# Altium PCB Elreg_Sender_NoFPGA.PcbDoc (part 1 of 2)
Units mil, origin at the board's own origin, x right, y up, seen from the top; angles counter-clockwise.
Board outline 6000 x 4000 mil, 4 copper layers (Top Layer, L2_GND, L3_GND, Bottom Layer), stack 62.362 mil thick; 139 components, 68 nets, 309 pads, 0 vias.
Unrouted connection lines stored in the file: 233.
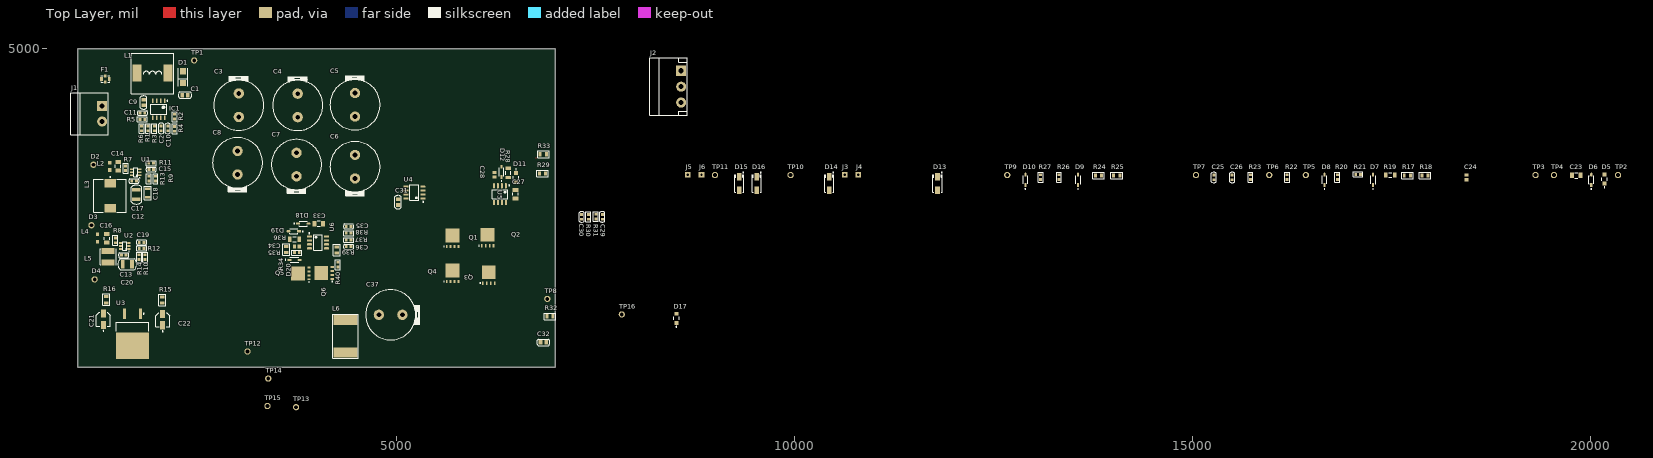
[diagram p0: Top Layer view]
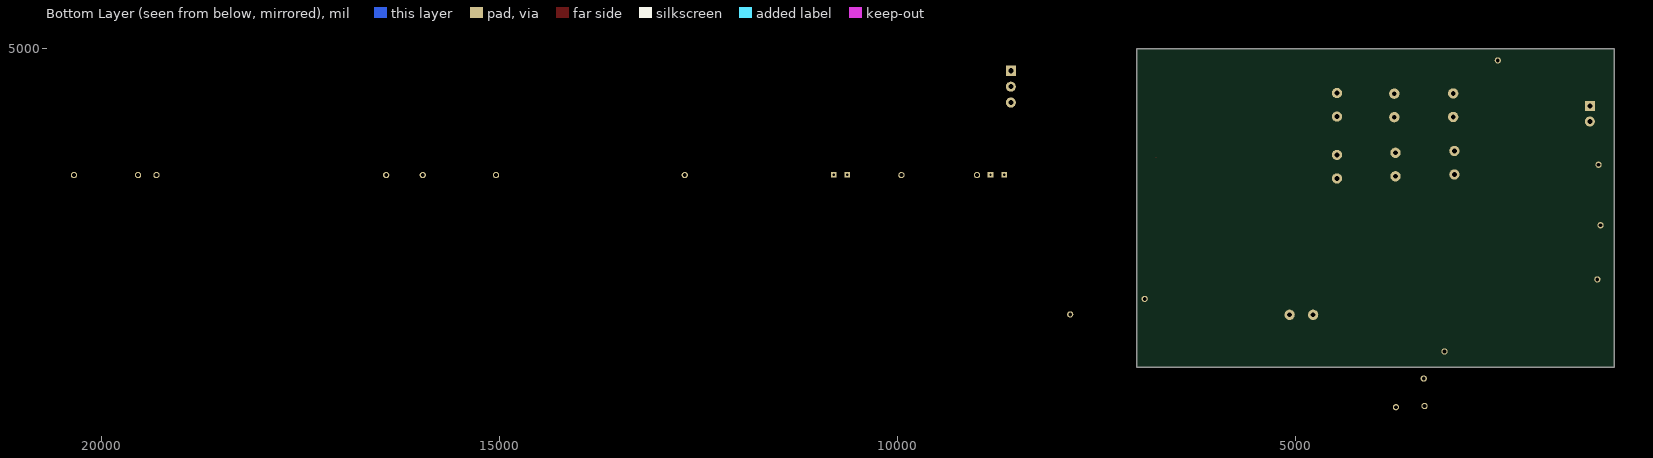
[diagram p1: Bottom Layer view, seen from below]
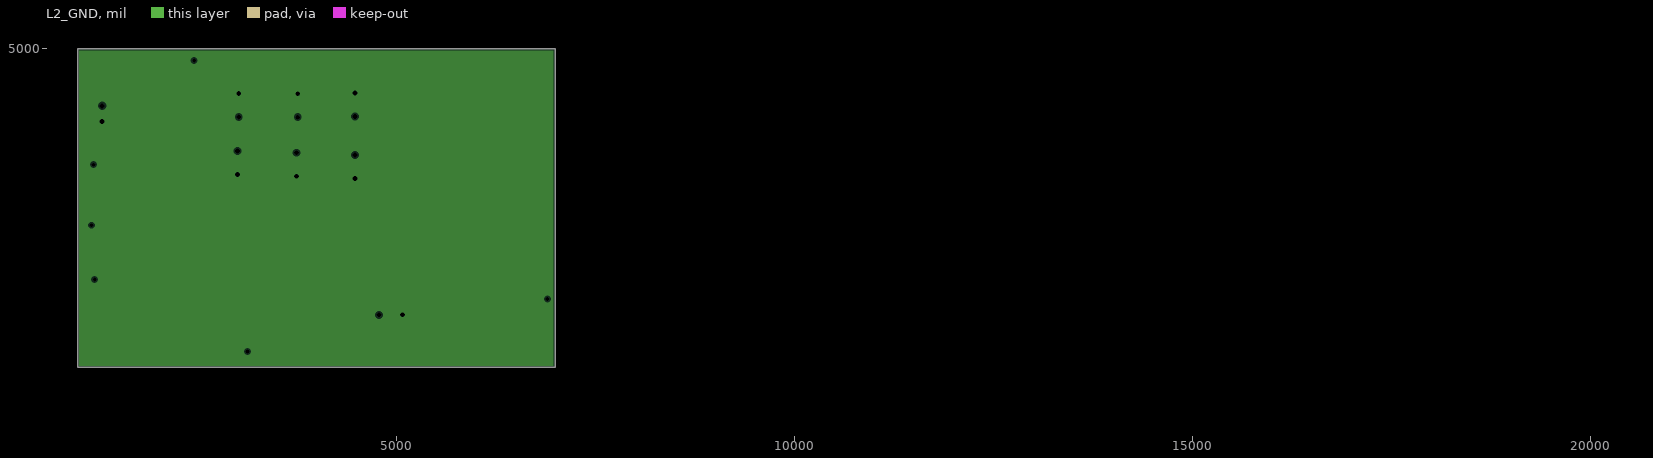
[diagram p2: L2_GND, clearances drawn from the general rule]
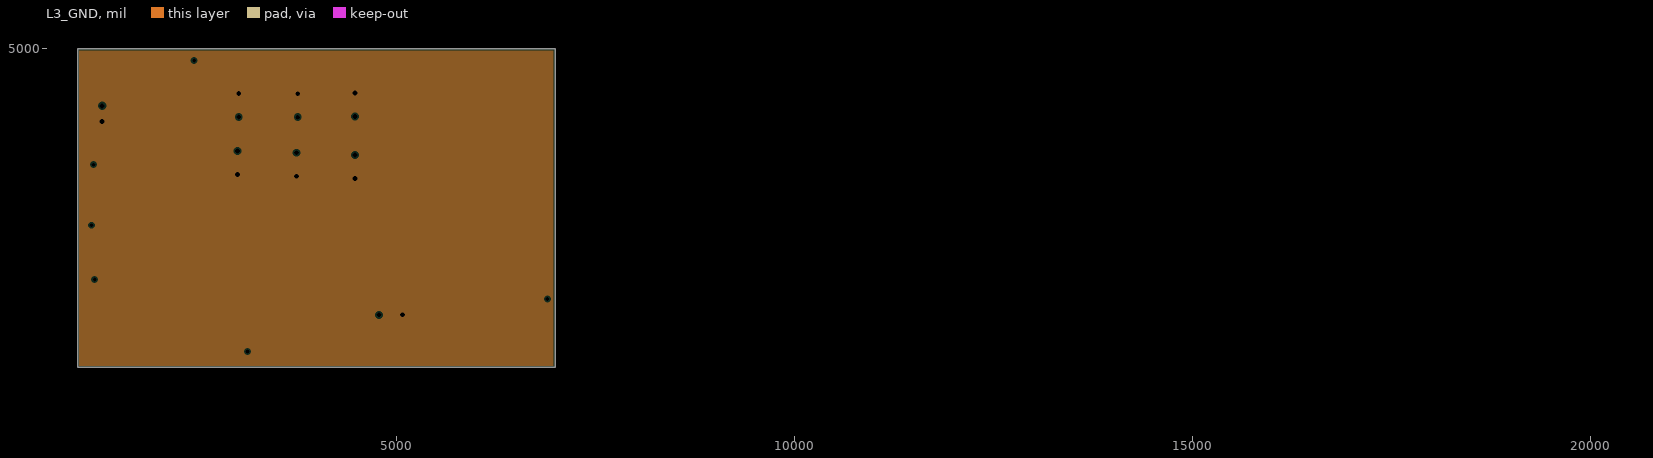
[diagram p3: L3_GND, clearances drawn from the general rule]

## Layer stack, top to bottom
Top Solder: solder mask 0.3937, Solder Resist, Dk 3.5
Top Layer: signal copper 1.378
Dielectric 2: prepreg 7.0866, PP-006, Dk 4.1
L2_GND: plane copper 0.6693, net GND
Dielectric 1: core 44.0945, FR-4, Dk 4.8
L3_GND: plane copper 0.6693, net GND
Dielectric 3: prepreg 7.0866, PP-006, Dk 4.1
Bottom Layer: signal copper 1.378
Bottom Solder: solder mask 0.3937, Solder Resist, Dk 3.5

## Board outline
1000,1000 7000,1000 7000,5000 1000,5000

## Design rules (kind name [scope] priority, off if disabled: settings)
Clearance [All] p1: gap=10 ignorepadtopadclearanceinfootprint=FALSE except(0: Arc-Hole Track-Hole SMDPad-Hole THPad-Hole Via-Hole Fill-Hole Poly-Hole Region-Hole Text-Hole)
PlaneClearance [All] p1: clearance=20
PlaneConnect [All] p1: planeconnectstyle=Relief reliefexpansion=20 reliefentries=4 reliefconductorwidth=10 reliefairgap=10
PolygonConnect [All] p1: connectstyle=Relief reliefconductorwidth=10 reliefentries=4 polygonreliefangle="90 Angle" airgapwidth=10
RoutingVias [All] p1: holewidth=28 width=50 viastyle="Through Hole" minholewidth=28 minwidth=50 maxholewidth=28 maxwidth=50
SolderMaskExpansion [All] p1: expansion=4 istentingtop=FALSE
Width [All] p1: maxlimit=10 minlimit=10 preferedwidth=10
28 further rules are at their usual default settings.

## Classes and differential pairs
component class Designator: C33 C34 C35 C36 C37 D16 D18 D19 D20 L6 Q5 Q6 R34 R35 R36 R37 R38 R39 R40 TP12 TP13 TP14 TP15 TP16 U6
component class "TRANSMIT CH 1": C23 C24 C25 C26 C27 C28 C29 C32 D5 D6 D7 D9 D10 D12 D14 D16 J3 J5 Q1 Q2 Q3 R17 R18 R19 R20 R21 R22 R23 R24 R25 R26 R27 R28 R29 R30 R31 R32 R33 TP3 TP6 TP7 TP10 U4 U5
component class Sender_Top: J1 J2
component class "POWER CIRCUIT": C1 C2 C3 C4 C5 C6 C7 C8 C9 C10 C11 C12 C13 C14 C15 C16 C17 C18 C19 C20 C21 C22 D1 D2 D4 F1 IC1 L1 L2 L3 L4 L5 R1 R2 R3 R4 R5 R6 R7 R8 R9 R10 R11 R12 R13 R14 R15 R16 TP3 U1 U2 U3

## Components (designator, comment, footprint, x,y, rotation, side; value= is the part's Value field where it differs from the comment)
C1 "100uF 50V" C-0805 2349.57,4420 r0 top
C2 "10uF 50V" C-0603 2050,4000 r270 top
C3 "35V2200u" CAP_16X25 3025,4292.36 r90 top
C4 "35V2200u" CAP_16X25 3765,4290 r90 top
C5 "35V2200u" CAP_16X25 4485,4297.36 r90 top
C6 "35V2200u" CAP_16X25 4485,3520 r270 top
C7 "35V2200u" CAP_16X25 3750,3547.36 r270 top
C8 "35V2200u" CAP_16X25 3010,3570 r270 top
C9 "10uF 50V" C-0805 1830,4325 r270 top
C10 "100nF 20V" C-0603 2135,4000 r90 top
C11 "10uF 50V" C-0603 1814.53,4195 r180 top
C12 "0.1uF/25V" C-0603 1710,3340 r0 top
C13 "0.1uF/25V" C-0603 1580,2410 r0 top
C14 "2.2uF/50V" FP-CL31-IPC_B 1510,3525 r270 top
C15 "22pF/25V" C-0603 1925.47,3485 r0 top
C16 "2.2uF/50V" FP-CL31-IPC_B 1370,2620 r270 top
C17 "22uF/25V" CAP-1210 1740,3170 r270 top
C18 "10uF/25V" "C-1206 (3216 metric)" 1880,3190 r90 top
C19 "22pF/25V" C-0603 1805,2570 r0 top
C20 "22uF/25V" CAP-1210 1625,2295 r180 top
C21 "0.1uF/35V" FP-UUP1H0R1MCL1GS-MFG 1325,1605 r90 top
C22 "0.33uF/35V" FP-UUP1H0R1MCL1GS-MFG 2070,1600 r90 top
C23 "2.2uF/50V" FP-CL31-IPC_B 19820,3410 r0 top
C24 "1uF/25V" CAPC2013X70X45LL10T25 18440,3385 r90 top
C25 "100pF/25V" C-0603 15270,3385 r90 top
C26 "100pF/25V" C-0603 15500,3385 r90 top
C27 "2.2uF/50V" FP-CL31-IPC_B 6500,3175.38 r90 top
C28 "1uF/25V" CAPC2013X70X45LL10T25 6235,3419.09 r270 top
C29 "100pF/25V" C-0603 7590,2890 r270 top
C30 "100pF/25V" C-0603 7330,2889.53 r90 top
C31 "C-0805" C-0805 5025,3075 r270 top
C32 "C-0805" C-0805 6849.57,1315 r0 top
C33 "2.2uF/50V" FP-CL31-IPC_B 4030,2805 r180 top
C34 "1uF/25V" CAPC2013X70X45LL10T25 3754.53,2520 r0 top
C35 "100pF/25V" C-0603 4405,2770 r180 top
C36 "100pF/25V" C-0603 4405,2515 r180 top
C37 "100uF/100V" CAP_16X25 4932.36,1660 r0 top
D1 "DIODE SCHOTTKY 40V 1A DO214AC" DFN380P520X45-2N 2325,4720 r90 top
D2 "Test_Point" Test_Point 1200,3545 r0 top
D3 "Test_Point" Test_Point 1175,2785 r0 top
D4 "Test_Point" Test_Point 1215,2105 r0 top
D5 "MBR2H200SFT1G" FP-498-MFG 20175,3365 r90 top
D6 "B0530W-7-F" FP-SOD123-IPC_B 20010,3355 r90 top value=170pF
D7 "B0530W-7-F" FP-SOD123-IPC_B 17270,3355 r90 top value=170pF
D8 "B0530W-7-F" FP-SOD123-IPC_B 16660,3355 r90 top value=170pF
D9 "B0530W-7-F" FP-SOD123-IPC_B 13565,3355 r90 top value=170pF
D10 "B0530W-7-F" FP-SOD123-IPC_B 12905,3355 r90 top value=170pF
D11 "MBR2H200SFT1G" FP-498-MFG 6505,3382.64 r270 top
D12 "B0530W-7-F" FP-SOD123-IPC_B 6325,3454.54 r90 top value=170pF
D13 "ES1D" SMA 11800,3310 r90 top
D14 "ES1D" SMA 10440,3310 r90 top
D15 "ES1D" SMA 9310,3310 r90 top
D16 "ES1D" SMA 9530,3310 r90 top
D17 "MBR2H200SFT1G" FP-498-MFG 8520,1615 r90 top
D18 "B0530W-7-F" FP-SOD123-IPC_B 3835,2805 r0 top value=170pF
D19 "B0530W-7-F" FP-SOD123-IPC_B 3715,2710 r180 top value=170pF
D20 "B0530W-7-F" FP-SOD123-IPC_B 3725,2350 r0 top value=170pF
F1 "SBSPP0500683MX" Filter_SBSPP0500 1301,4622 r0 top
IC1 "LM5002" SOIC127P600X205-8N 2095,4349.57 r270 top
J1 "24V IN" WAGO_2_pins 1310,4285 r270 top
J2 "CONN 3x1" WAGO-3_pins 8580,4525 r270 top
J3 "CON1_b" "CONN1 _b" 10635,3420 r0 top
J4 "CON1_b" "CONN1 _b" 10805,3420 r0 top
J5 "CON1_b" "CONN1 _b" 8665,3420 r0 top
J6 "CON1_b" "CONN1 _b" 8835,3420 r0 top
L1 "330UH 1.15A" IND 1749.17,4695 r0 top
L2 "742792037" SMD-0805 1405,3525 r270 top
L3 "33uH/1.6A" FP-DS104C2-MFG 1410,3155 r270 top
L4 "742792037" SMD-0805 1250,2625 r270 top
L5 "15uH/1.2A" FP-LQH5BPB_T0-MFG 1385,2390 r270 top
L6 "260nH/72A" PA2891_FOOTPRINT 4365,1390 r90 top
Q1 "BUK7Y9R9-80EX" NXP-SOT669_N 5710,2619.57 r90 top
Q2 "BUK7Y9R9-80EX" NXP-SOT669_N 6150,2630 r90 top
Q3 "BUK7Y9R9-80EX" NXP-SOT669_N 6165,2160 r90 top
Q4 "BUK7Y9R9-80EX" NXP-SOT669_N 5710,2179.57 r90 top
Q5 "BUK7Y9R9-80EX" NXP-SOT669_N 3805,2180 r180 top
Q6 "BUK7Y9R9-80EX" NXP-SOT669_N 4095.43,2185 r180 top
R1 "54.9k  0805" R-0603 1885,4000 r270 top
R2 "60k4" R-0603 2220,4149.53 r90 top
R3 "73.2k  0805" R-0603 1965,4000 r90 top
R4 "6k04" R-0603 2220,3995 r90 top
R5 "52.3k  0805" R-0603 1815,4115 r0 top
R6 "1.47k  0805" R-0603 1805,4000 r90 top
R7 "100k" R-0603 1605,3500 r90 top
R8 "100k" R-0603 1475,2595 r90 top
R9 "51R" R-0603 1980,3370.47 r270 top
R10 "51R" R-0603 1850,2385 r270 top
R11 "243k" R-0603 1925,3565 r0 top
R12 "105k" R-0603 1805,2495 r0 top
R13 "22.1k" R-0603 1895,3370.47 r90 top
R14 "21k" R-0603 1775,2385 r90 top
R15 "0R" RES-0805 2065,1845 r270 top
R16 "0R" RES-0805 1360,1850 r270 top
R17 "8.2R" RES-0805 17700,3410 r0 top
R18 "8.2R" RES-0805 17920,3410 r0 top
R19 "2R" RESC3216X60X45NL10T20 17485,3415 r0 top
R20 "10k" R-0603 16820,3390 r90 top
R21 "10k" R-0603 17080,3425 r0 top
R22 "1k" R-0603 16190,3390 r90 top
R23 "1k" R-0603 15730,3390 r90 top
R24 "8.2R" RES-0805 13820,3410 r0 top
R25 "8.2R" RES-0805 14050,3410 r0 top
R26 "10k" R-0603 13325,3390 r90 top
R27 "10k" R-0603 13095,3390 r90 top
R28 "2R" RESC3216X60X45NL10T20 6410,3441.65 r90 top
R29 "0R" RES-0805 6840,3435 r0 top
R30 "1k" R-0603 7415,2890 r90 top
R31 "1k" R-0603 7510,2894.53 r270 top
R32 "0R NM" RES-0805 6934.37,1640 r0 top
R33 "0R" RES-0805 6850,3675 r0 top
R34 "8.2R" RES-0805 3620,2480 r270 top
R35 "10k" R-0603 3754.53,2440 r180 top
R36 "2R" RESC3216X60X45NL10T20 3725,2610 r180 top
R37 "1k" R-0603 4405,2600 r180 top
R38 "1k" R-0603 4405,2685 r180 top
R39 "8.2R" RES-0805 4255,2475 r270 top
R40 "10k" R-0603 4270,2290.47 r90 top
TP1 "Test_Point" Test_Point 2465,4855 r0 top
TP2 "Test_Point" Test_Point 20345,3415 r0 top
TP3 "Test_Point" Test_Point 19310,3415 r0 top
TP4 "Test_Point" Test_Point 19540,3415 r0 top
TP5 "Test_Point" Test_Point 16425,3415 r0 top
TP6 "Test_Point" Test_Point 15965,3415 r0 top
TP7 "Test_Point" Test_Point 15045,3415 r0 top
TP8 "Test_Point" Test_Point 6900,1860 r0 top
TP9 "Test_Point" Test_Point 12675,3415 r0 top
TP10 "Test_Point" Test_Point 9955,3415 r0 top
TP11 "Test_Point" Test_Point 9005,3415 r90 top
TP12 "Test_Point" Test_Point 3135,1200 r90 top
TP13 "Test_Point" Test_Point 3745,500 r90 top
TP14 "Test_Point" Test_Point 3395,860 r90 top
TP15 "Test_Point" Test_Point 3385,515 r90 top
TP16 "Test_Point" Test_Point 7835,1665 r90 top
U1 "LMR50410XFDBVR" SOT-23 1730,3450 r180 top
U2 "LMR50410XFDBVR" SOT-23 1595,2525 r180 top
U3 "MC7806BD2TG" D2PAK 1690,1425 r270 top
U4 "UCC27211D" "D-8 PIN 1.27pitch" 5230,3194.57 r180 top
U5 "UCC27211D" "D-8 PIN 1.27pitch" 6305,3174.57 r270 top
U6 "UCC27211D" "D-8 PIN 1.27pitch" 4020,2570 r0 top

## Footprints (in the part's own frame and the unit in brackets; to place one, negate y for a bottom-side part, rotate by r counter-clockwise, add the part's x,y. Pads: shape width x height; smd on the part's side, far side on the other; paste and mask are expansions set on the pad)
C-0603 [mm] "Capacitors 0603"
  rect 0.9x0.95 smd: 1(-0.75,0) 2(0.75,0)
  silkscreen extent -1.68,-0.78 1.66,0.77, body extent -0.8,-0.4 0.8,0.4, height 0.86
C-0805 [mm] "0805"
  rect 1.15x1.45 smd: 1(-0.9,0) 2(0.9,0)
  silkscreen extent -2.12,-1.02 2.12,1.02, body extent -1,-0.63 1,0.63, height 0.78
"C-1206 (3216 metric)" [mm]
  rect 0.9x1.8 smd: 1(-1.35,0) 2(1.35,0)
  silkscreen extent -2.16,-1.14 2.16,1.14, body extent -1.6,-0.85 1.6,0.85, height 1.77
CAP-1210 [mm] "Capacitors, SMD, 1210"
  rect 1.15x2.7 smd: 1(-1.5,0) 2(1.5,0)
  silkscreen extent -3.01,-1.73 3.01,1.73, body extent -1.6,-1.25 1.6,1.25, height 1.3
CAP_16X25 [mil] "Polar Capacitors"
  round 130 hole 59.06: 1(-147.64,0) 2(147.64,0)
  silkscreen extent -315,-315 362,315, body extent -315,-315 313,315, height 985
CAPC2013X70X45LL10T25 [mm] "Chip Capacitor, 2-Leads, Body 2.00x1.25mm, IPC High Density"
  rect 1x1.3 smd: 1(-0.75,0) 2(0.75,0)
  body extent -1.05,-0.67 1.05,0.68, height 0.7
"CONN1 _b" [mm]
  rect 1.8x1.8 hole 0.75: 1(0,0)
D2PAK [mm] "DPAK, 3-Leads, Body 10.24x9.35mm, Pitch 2.54mm"
  rect 3.504x1.016 smd: 1(-6.313,2.54) 3(-6.313,-2.54)
  rect 8.38x10.49 smd: 4(3.9,0)
  silkscreen extent -6.44,-5.12 -0.69,5.12, body extent -6.11,-5.13 8.09,5.13, height 4.75
"D-8 PIN 1.27pitch" [mm] "Pitch 1.27mm"
  rrect50% 1.6x0.7 smd: 1(-2.7,1.905) 2(-2.7,0.635) 3(-2.7,-0.635) 4(-2.7,-1.905) 5(2.7,-1.905) 6(2.7,-0.635) 7(2.7,0.635) 8(2.7,1.905)
  silkscreen extent -2.95,-2.5 1.4,3.08, body extent -2,-2.5 2,2.5, height 1.1
DFN380P520X45-2N [mm] "DFN, 2-Leads, Body 2.50x5.20mm, Pitch 3.80mm, IPC Medium Density"
  rect 2x1.9 smd: 1(0,0) 2(-3.8,0)
  silkscreen extent -4.75,-1.45 0.95,1.45, body extent -4.75,-1.45 0.95,1.45, height 0.45
Filter_SBSPP0500 [mm]
  rect 0.9x1.2 smd: 1(0,0) 3(2.5,0)
  rect 0.8x1 smd: 2(1.245,-0.991) 2(1.245,0.965)
  silkscreen extent -0.13,-1.02 2.67,1.02
FP-498-MFG [mm]
  rect 1.25x1.22 smd paste+0 mask+0: 1(-1.475,0) 2(1.475,0)
  silkscreen extent -2.77,-0.9 0.48,0.9, body extent -2.2,-1 2.2,1, height 0.25
FP-CL31-IPC_B [mil]
  rect 51.4x69.22 smd paste+0 mask+0: 1(-54.19,0) 2(54.19,0)
  silkscreen extent -17,-35 17,35, body extent -90,-44 90,44, height 10
FP-DS104C2-MFG [mm]
  rect 2.65x3.6 smd paste+0 mask+0: 1(-4.025,0) 2(4.025,0)
  silkscreen extent -6.1,-5.2 5.2,5.2, body extent -5.45,-5.3 5.45,5.3, height 0.25
FP-LQH5BPB_T0-MFG [mm]
  rect 1.85x4.1 smd paste+0 mask+0: 1(-1.825,0) 2(1.825,0)
  silkscreen extent -2.6,-2.6 2.6,2.6, body extent -2.85,-2.7 2.85,2.7, height 0.25
FP-SOD123-IPC_B [mil]
  rect 49.51x27.66 smd paste+0 mask+0: 1(-64.98,0)
  rrect100% 49.51x27.66 smd paste+0 mask+0: 2(64.98,0)
  silkscreen extent -119,-31 52,31, body extent -100,-40 100,40, height 10
FP-UUP1H0R1MCL1GS-MFG [mm]
  rect 2.6x1.6 smd paste+0 mask+0: 1(-1.8,0) 2(1.8,0)
  silkscreen extent -3.85,-2.25 2.25,2.25, body extent -3.35,-2.5 3.35,2.5, height 0.25
IND [mm]
  rect 2.9x5.4 smd: 1(0,0) 2(9.8,0)
  silkscreen extent -1.9,-6.6 11.7,6.4
NXP-SOT669_N [mm] "DPAK, 4-Leads, Body 5x4.1mm, Pitch 1.27mm, IPC Medium Density"
  rect 1.05x0.55 smd: 1(-2.6,1.905) 2(-2.6,0.635) 3(-2.6,-0.635) 4(-2.6,-1.905)
  rect 4.4x4.4 smd: 5(0.9,0)
  silkscreen extent -2.72,2.6 -2.48,2.85, body extent -1.9,-2.5 2.2,2.5, height 1.2
PA2891_FOOTPRINT [mm]
  rect 3.18x7.65 smd paste+0: 1(-5.15,0) 2(5.15,0)
  silkscreen extent -6.98,-4.06 6.98,4.06, body extent -6.35,-3.56 6.35,3.68, height 8
R-0603 [mm] "Resistor  0603"
  rect 0.9x0.95 smd: 1(-0.75,0) 2(0.75,0)
  silkscreen extent -1.58,-0.77 1.57,0.77, body extent -0.8,-0.4 0.8,0.4, height 0.86
RES-0805 [mm] "SMD, 0805"
  rect 0.95x1.4 smd: 1(-1,0) 2(1,0)
  silkscreen extent -1.85,-1.08 1.85,1.08, body extent -1,-0.62 1,0.63, height 0.45
RESC3216X60X45NL10T20 [mm] "Chip Resistor, 2-Leads, Body 3.20x1.60mm, IPC Medium Density"
  rect 1.1x1.7 smd: 1(-1.45,0) 2(1.45,0)
  silkscreen extent -0.5,-0.75 0.5,0.75, body extent -1.65,-0.85 1.65,0.85, height 0.6
SMA [mm] "DO-214AC"
  rect 2.35x1.55 smd: 1(-2.15,0) 2(2.15,0)
  silkscreen extent -2.8,-1.5 3.58,1.5, body extent -2.6,-1.3 2.6,1.3, height 2.64
SMD-0805 [mm] "Chip Inductor, 2-Leads, Body 2.0x1.2mm"
  rect 1.15x1 smd: 1(-1.175,0) 2(1.175,0)
  body extent -1,-0.6 1,0.6, height 0.89
SOIC127P600X205-8N [mm] "SOIC, 8-Leads, Body 4.90x3.90mm, Pitch 1.27mm, IPC Medium Density"
  oval 1.45x0.6 smd: 1(0,0) 2(0,-1.27) 3(0,-2.54) 4(0,-3.81) 5(5.45,-3.81) 6(5.45,-2.54) 7(5.45,-1.27) 8(5.45,0)
  silkscreen extent -0.12,-4.41 4.33,0.98, body extent 0.72,-4.41 4.72,0.6, height 2.05
SOT-23 [mm] "Pitch 0.95mm"
  rrect50% 1.1x0.6 smd: 1(-1.3,0.95) 2(-1.3,0) 3(-1.3,-0.95) 4(1.3,-0.95) 5(1.3,0) 6(1.3,0.95)
  silkscreen extent -1.32,-1.4 0.64,1.83, body extent -0.76,-1.4 0.76,1.4, height 1.1
Test_Point [mm]
  round 2 hole 1.2: 1(0,0)
WAGO-3_pins [mm] "3 pin connector"
  rect 3.2x3.2 hole 1.6: 1(-5.08,0)
  round 3.2 hole 1.6: 2(0,0) 3(5.08,0)
  silkscreen extent -9.18,-10 9.18,2, body extent -9.1,-10 9.1,2, height 8.4
WAGO_2_pins [mm]
  rect 3.2x3.2 hole 1.6: 1(0,0)
  round 3.2 hole 1.6: 2(5,0)
  silkscreen extent -4.08,-10 9.2,2

## Part data
C1 C2 C9 C11: library part C-0805_10uF, Manufacturer 1=Yageo, Manufacturer Part Number 1=CC1206KKX7RBBB332, Operating Temperature="-55°C ~ 125°C", Package / Case="1206 (3216 Metric)", Ratings=-, Supplier Part Number 1=311-1506-1-ND, Temperature Coefficient=X7R, Tolerance=±10%, Voltage - Rated=500V, Applications="General Purpose", Category 1=Capacitors, ComponentLink1Description=http://www.yageo.com/documents/recent/UPY-NP0X7R_MV_100-to-630V_21.pdf, ComponentLink1URL=http://www.yageo.com/documents/recent/UPY-NP0X7R_MV_100-to-630V_21.pdf, Description 1="CAP CER 3300PF 500V X7R 1206", Failure Rate=-, Features=-, Height - Seated (Max)=-, Lead Spacing=-, Lead Style=-, Mounting Type="Surface Mount, MLCC", Notification="Current market demand for these product types have resulted in fluctuating and extending lead times. Lead times may differ.", Packaging="Cut Tape (CT)", Part Status=Active, Pricing 1="1=0.31, 10=0.214, 100=0.1085, 500=0.07424, 1000=0.06568 (USD)", RoHS 1="RoHS Compliant", Size / Dimension="0.126\" L x 0.063\" W (3.20mm x 1.60mm)", Stock 1=4928, Supplier 1=Digi-Key, Thickness (Max)="0.057\" (1.45mm)"
C3 C4 C5 C6 C7 C8: library part CAP_2200uF_35V, "Capacitor", Capacitance=2200µF, ESR (Equivalent Series Resistance)=-, Lifetime @ Temp.="2000 Hrs @ 105°C", Manufacturer=Kemet, Manufacturer Part Number=ESH228M035AM7AA, Operating Temperature="-40°C ~ 105°C", Package / Case="Radial, Can", Supplier Part Number 1=399-6572-ND, Tolerance=±20%, Voltage Rating=35V, Applications="General Purpose", Category=Capacitors, ComponentLink1Description=http://www.kemet.com/docfinder?Partnumber=ESH228M035AM7AA, ComponentLink1URL=http://www.kemet.com/docfinder?Partnumber=ESH228M035AM7AA, Height - Seated (Max)="1.063\" (27.00mm)", Impedance=-, Lead Spacing="0.295\" (7.50mm)", Mounting Type="Through Hole", Packaging=Bulk, Pricing 1="1=0.98, 10=0.77, 50=0.6676, 100=0.5778, 250=0.5136, 500=0.43656, 1000=0.3852, 2500=0.35952, 5000=0.34668 (USD)", Ripple Current=-, RoHS="RoHS Compliant", Size / Dimension="0.630\" Dia (16.00mm)", Stock 1=1972, Supplier 1=Digi-Key, Surface Mount Land Size=-, Type=-
C10: library part C-0805_100nF, Manufacturer 1=Yageo, Manufacturer Part Number 1=CC1206KKX7RBBB332, Operating Temperature="-55°C ~ 125°C", Package / Case="1206 (3216 Metric)", Ratings=-, Supplier Part Number 1=311-1506-1-ND, Temperature Coefficient=X7R, Tolerance=±10%, Voltage - Rated=500V, Applications="General Purpose", Category 1=Capacitors, ComponentLink1Description=http://www.yageo.com/documents/recent/UPY-NP0X7R_MV_100-to-630V_21.pdf, ComponentLink1URL=http://www.yageo.com/documents/recent/UPY-NP0X7R_MV_100-to-630V_21.pdf, Description 1="CAP CER 3300PF 500V X7R 1206", Failure Rate=-, Features=-, Height - Seated (Max)=-, Lead Spacing=-, Lead Style=-, Mounting Type="Surface Mount, MLCC", Notification="Current market demand for these product types have resulted in fluctuating and extending lead times. Lead times may differ.", Packaging="Cut Tape (CT)", Part Status=Active, Pricing 1="1=0.31, 10=0.214, 100=0.1085, 500=0.07424, 1000=0.06568 (USD)", RoHS 1="RoHS Compliant", Size / Dimension="0.126\" L x 0.063\" W (3.20mm x 1.60mm)", Stock 1=4928, Supplier 1=Digi-Key, Thickness (Max)="0.057\" (1.45mm)"
C12 C13: library part 06033C104JAZ2A, "0.1µF ±5% 25V Ceramic Capacitor X7R 0603 (1608 Metric)", Capacitance=100nF, Case/Package=0603, Dielectric=X7R, Manufacturer="Kyocera AVX", Max Operating Temperature=125°C, Min Operating Temperature=-55°C, Package Quantity=4000, Tolerance=5%, Voltage Rating=25V, Category="Ceramic Capacitors", ComponentLink1Description=http://catalogs.avx.com/SurfaceMount.pdf?src-supplier=Digi-Key, ComponentLink1URL=http://catalogs.avx.com/SurfaceMount.pdf?src-supplier=Digi-Key, Features="Soft Termination", Length=0.063inch, Manufacturer Part Number=06033C104JAZ2A, Mount="Surface Mount", Packaging="Tape and Reel", RoHS Compliant=Yes, Thickness=0.035inch, Voltage Rating (DC)=25V, Width=0.031inch
C14 C16 C23 C27 C33: library part CL31B225KBHVPNE, "Cap Ceramic 2.2uF 50V X7R ±10% SMD 1206 +125°C Embossed T/R", Capacitance=2.2uF, Case Code (Imperial)=1206, Case Code (Metric)=3216, Dielectric=X7R, Max Operating Temperature=125°C, Min Operating Temperature=-55°C, Ratings=AEC-Q200, Tolerance=10%, Voltage Rating=50V, Case/Package=1206, Features="Soft Termination", Length=0.126inch, Mount="Surface Mount", Packaging="Tape and Reel", Thickness=0.071inch, Width=0.063inch
C15 C19: library part C0603C220K3GACTU, "22pF ±10% 25V Ceramic Capacitor C0G, NP0 0603 (1608 Metric)", Capacitance=22pF, Case Code (Imperial)=0603, Case Code (Metric)=1608, Dielectric=C0G, Dielectric Material=Ceramic, Manufacturer=KEMET, Max Operating Temperature=125°C, Min Operating Temperature=-55°C, Package Quantity=4000, Tolerance=10%, Voltage Rating=25V, Case/Package=0603, Category="Ceramic Capacitors", ComponentLink1Description=https://datasheet.ciiva.com/5413/kem-c1003-c0g-smd-356956-5413159.pdf?src-supplier=Mouser, ComponentLink1URL=https://datasheet.ciiva.com/5413/kem-c1003-c0g-smd-356956-5413159.pdf?src-supplier=Mouser, Construction=Flat, Contact Plating=Tin,Matte, Depth=0.8mm, Dissipation Factor=0.1%, Height=0.8mm, Lead Free="Lead Free", Lead Pitch=0.7mm, Length=1.6mm, Manufacturer Part Number=C0603C220K3GACTU, Mount="Surface Mount", Packaging="Tape and Reel", Radiation Hardening=No, RoHS Compliant=Yes, Series=C, Termination=SMD/SMT, Thickness=0.034inch, Voltage Rating (DC)=25V, Width=0.031inch
C17 C20: library part CL32B226KAJNNNE, "22µF ±10% 25V Ceramic Capacitor X7R 1210 (3225 Metric)", Capacitance=22uF, Case Code (Imperial)=1210, Case Code (Metric)=3225, Dielectric=X7R, Manufacturer=Samsung, Max Operating Temperature=125°C, Min Operating Temperature=-55°C, Package Quantity=1, Tolerance=10%, Voltage Rating=25V, Case/Package=1210, Category="Ceramic Capacitors", Construction=Flat, Depth=2.5mm, Height=2.5mm, Lead Free="Lead Free", Length=3.2mm, Manufacturer Part Number=CL32B226KAJNNNE, Material=Ceramic, Mount="Surface Mount", Packaging="Tape and Reel", Radiation Hardening=No, RoHS Compliant=Yes, Series=CL, Thickness=0.106inch, Voltage Rating (DC)=25V, Width=0.098inch
C18: library part CL31B106KAHNNNE, "10µF ±10% 25V Ceramic Capacitor X7R 1206 (3216 Metric)", Capacitance=10uF, Case Code (Imperial)=1206, Case Code (Metric)=3216, Dielectric=X7R, Manufacturer=Samsung, Max Operating Temperature=125°C, Min Operating Temperature=-55°C, Package Quantity=1, Tolerance=10%, Voltage=25V, Case/Package=1206, Category="Ceramic Capacitors", ComponentLink1Description=https://datasheet.ciiva.com/25795/cl31b106kahnnne-25795260.pdf?src-supplier=Digi-Key, ComponentLink1URL=https://datasheet.ciiva.com/25795/cl31b106kahnnne-25795260.pdf?src-supplier=Digi-Key, Construction=Flat, Depth=1.6mm, Height=1.6mm, Length=3.2mm, Manufacturer Part Number=CL31B106KAHNNNE, Mount="Surface Mount", Packaging="Tape and Reel", Radiation Hardening=No, RoHS Compliant=Yes, Series=CL, Thickness=0.071inch, Voltage Rating=25V, Width=0.063inch
C21: library part UUP1H0R1MCL1GS, "0.1µF 50V Aluminum Electrolytic Capacitors Radial, Can - SMD  1000 Hrs @ 105°C", Capacitance=100nF, Case/Package=Radial, Leakage Current=10uA, Max Operating Temperature=105°C, Min Operating Temperature=1000°C, Package Quantity=2000, Ripple Current=1mA, Tolerance=20%, Voltage Rating=50V, Diameter=4mm, Dissipation Factor=0.15%, Height=5.8mm, Height - Seated (Max)=0.157inch, Length=5.8mm, Life (Hours)=1000Hour, Mount="Surface Mount", Packaging="Tape and Reel", Radiation Hardening=No, Termination=SMD/SMT, Voltage Rating (DC)=50V
C22: library part UZS1HR33MCL1GB, "0.33µF 50V Aluminum Electrolytic Capacitors Radial, Can - SMD  2000 Hrs @ 85°C", Capacitance=330nF, Case/Package=Radial, Leakage Current=3uA, Manufacturer=Nichicon, Max Operating Temperature=85°C, Min Operating Temperature=-40°C, Package Quantity=2000, Ripple Current=2.8mA, Tolerance=20%, Voltage Rating=50V, Category="Aluminum Electrolytic Capacitors", Features="General Purpose", Height - Seated (Max)=0.157inch, Length=4.5mm, Life (Hours)=2000Hour, Manufacturer Part Number=UZS1HR33MCL1GB, Mount="Surface Mount", Packaging="Tape and Reel", RoHS Compliant=Yes, Series=ZS, Termination=SMD/SMT, Voltage Rating (DC)=50V
C24 C28 C34: library part GRM216R61E105KA12D, "1µF ±10% 25V Ceramic Capacitor X5R 0805 (2012 Metric)", Manufacturer=Murata, Part Number=GRM216R61E105KA12D
C25 C26 C29 C30 C35 C36: library part C0201C101J3GACTU, "100pF ±5% 25V Ceramic Capacitor C0G, NP0 0201 (0603 Metric)", Capacitance=100pF, Case Code (Imperial)=0201, Case Code (Metric)=0603, Dielectric=C0G, Manufacturer=KEMET, Max Operating Temperature=125°C, Min Operating Temperature=-55°C, Package Quantity=1, Tolerance=5%, Voltage=25V, Case/Package=0201, Category="Ceramic Capacitors", ComponentLink1Description=https://datasheet.ciiva.com/25795/cl31b106kahnnne-25795260.pdf?src-supplier=Digi-Key, ComponentLink1URL=https://datasheet.ciiva.com/25795/cl31b106kahnnne-25795260.pdf?src-supplier=Digi-Key, Construction=Flat, Contact Plating=Tin,Matte, Depth=0.3mm, Height=0.3mm, Length=0.6mm, Manufacturer Part Number=C0201C101J3GACTU, Mount="Surface Mount", Packaging="Tape and Reel", Radiation Hardening=No, REACH SVHC="No SVHC", RoHS Compliant=Yes, Series=C, Termination=SMD/SMT, Thickness=0.013inch, Voltage Rating=25V, Voltage Rating (DC)=25V, Weight=6E-06oz, Width=0.3mm
C31 C32: Manufacturer 1=Yageo, Manufacturer Part Number 1=CC1206KKX7RBBB332, Operating Temperature="-55°C ~ 125°C", Package / Case="1206 (3216 Metric)", Ratings=-, Supplier Part Number 1=311-1506-1-ND, Temperature Coefficient=X7R, Tolerance=±10%, Voltage - Rated=500V, Applications="General Purpose", Category 1=Capacitors, ComponentLink1Description=http://www.yageo.com/documents/recent/UPY-NP0X7R_MV_100-to-630V_21.pdf, ComponentLink1URL=http://www.yageo.com/documents/recent/UPY-NP0X7R_MV_100-to-630V_21.pdf, Description 1="CAP CER 3300PF 500V X7R 1206", Failure Rate=-, Features=-, Height - Seated (Max)=-, Lead Spacing=-, Lead Style=-, Mounting Type="Surface Mount, MLCC", Notification="Current market demand for these product types have resulted in fluctuating and extending lead times. Lead times may differ.", Packaging="Cut Tape (CT)", Part Status=Active, Pricing 1="1=0.31, 10=0.214, 100=0.1085, 500=0.07424, 1000=0.06568 (USD)", RoHS 1="RoHS Compliant", Size / Dimension="0.126\" L x 0.063\" W (3.20mm x 1.60mm)", Stock 1=4928, Supplier 1=Digi-Key, Thickness (Max)="0.057\" (1.45mm)"
C37: library part CAP_470uF_100V, "Capacitor"
D1: Base Part Number=CDBA140, Capacitance @ Vr, F=-, Current - Average Rectified (Io)=1A, Manufacturer 1="Comchip Technology", Manufacturer Part Number 1=CDBA140-G, Operating Temperature - Junction="-65°C ~ 125°C", Package / Case="DO-214AC, SMA", Supplier Device Package="DO-214AC (SMA)", Supplier Part Number 1=641-1015-1-ND, Category 1="Discrete Semiconductor Products", ComponentLink1Description=http://www.comchiptech.com/admin/files/product/CDBA140-HF%20Thru192841.%20CDBA1100-HF%20RevB.pdf, ComponentLink1URL=http://www.comchiptech.com/admin/files/product/CDBA140-HF%20Thru192841.%20CDBA1100-HF%20RevB.pdf, Description 1="DIODE SCHOTTKY 40V 1A DO214AC", Diode Type=Schottky, Mounting Type="Surface Mount", Packaging="Cut Tape (CT)", Part Status=Active, Pricing 1="1=0.37, 10=0.338, 100=0.1893, 500=0.1014, 1000=0.06895 (USD)", RoHS 1="RoHS Compliant", Speed="Fast Recovery =< 500ns, > 200mA (Io)", Stock 1=527910, Supplier 1=Digi-Key
D5 D11 D17: "DIODE SCHOTTKY 200V 2A SOD123FL", Forward Current=2A, Manufacturer="ON Semiconductor", Max Junction Temp=+150°C, Max Repetitive Reverse Voltage=200V, Max Surge Forward Current=30A, Package=498, Peak Reverse Current=200uA, Temperature="-55°C to +150°C", Temperature Range Low=-55°C, Automotive=No, Category=Diode, ComponentLink2Description=Datasheet, ComponentLink2URL=https://www.onsemi.com/pub/Collateral/MBR2H200SF-D.PDF, Device Class L1="Discrete Semiconductors", Device Class L2=Diodes, Device Class L3="Schottky Diodes", Digikey Description="DIODE SCHOTTKY 200V 2A SOD123FL", Footprint Url=https://www.onsemi.com/pub/Collateral/498-01.PDF, Height=0.98mm, Lead Free=Yes, Manufacturer Part Number=MBR2H200SFT1G, Octopart=https://octopart.com/mbr2h200sft1g-on+semiconductor-51167333, Reverse Voltage=200V, RoHS=TRUE, Standoff Height=0mm, Temperature Range High=+150°C
D6 D7 D8 D9 D10 D12 D18 D19 D20: "DIODE SCHOTTKY 30V 500MA SOD123", Capacitance=170pF, Forward Current=0.5A, Manufacturer="Diodes Inc.", Max Junction Temp=+125°C, Max Repetitive Reverse Voltage=30V, Max Surge Forward Current=5.5A, Package=SOD123, Peak Reverse Current=130uA, Temperature="-65°C to +125°C", Temperature Range Low=-65°C, Automotive=No, Category=Diode, ComponentLink2Description=Datasheet, ComponentLink2URL=https://www.diodes.com/assets/Datasheets/ds30139.pdf, Device Class L1="Discrete Semiconductors", Device Class L2=Diodes, Device Class L3="Schottky Diodes", Digikey Description="DIODE SCHOTTKY 30V 500MA SOD123", Footprint Url=https://www.diodes.com/assets/Package-Files/SOD123.pdf, Height=1.45mm, Ipc Land Pattern Name=SOD365155X123-2, Lead Free=Yes, Manufacturer Part Number=B0530W-7-F, Mouser Description="Schottky Diodes & Rectifiers 30V 410mW", Octopart=https://octopart.com/b0530w-7-f-diodes+inc.-325721, Reverse Voltage=30V, RoHS=TRUE, Standoff Height=0mm, Temperature Range High=+125°C
D13 D14 D15 D16: library part ES1x, "Diode", Capacitance @ Vr, F="7pF @ 4V, 1MHz", Current - Average Rectified (Io)=1A, Current - Reverse Leakage @ Vr="5μA @ 200V", Manufacturer="Fairchild/ON Semiconductor", Operating Temperature - Junction="-55°C ~ 150°C", Package / Case="DO-214AC, SMA", Supplier Device Package="SMA (DO-214AC)", Supplier Part Number 1=ES1DFSTR-ND, Voltage - DC Reverse (Vr) (Max)=200V, Voltage - Forward (Vf) (Max) @ If="920mV @ 1A", Category="Discrete Semiconductor Products", ComponentLink1Description=https://www.fairchildsemi.com/datasheets/ES/ES1A.pdf, ComponentLink1URL=https://www.fairchildsemi.com/datasheets/ES/ES1A.pdf, Diode Type=Standard, Manufacturer Part Number=ES1D, Mounting Type="Surface Mount", Packaging="Tape & Reel (TR)", Part Status=Active, Pricing 1="7500=0.0567, 15000=0.0504, 37500=0.04725, 52500=0.0419, 187500=0.04032 (USD)", Reverse Recovery Time (trr)=15ns, RoHS="RoHS Compliant", Speed="Fast Recovery =< 500ns, > 200mA (Io)", Stock 1=135000, Supplier 1=Digi-Key
F1: library part Filter_SBSPP0500683MX
IC1: Current - Output="400mA (Switch)", Frequency - Switching="50kHz ~ 1.5MHz", Manufacturer 1="Texas Instruments", Manufacturer Part Number 1=LM5002SD/NOPB, Operating Temperature="-40°C ~ 125°C (TJ)", Package / Case="8-WDFN Exposed Pad", Supplier Device Package="8-WSON (4x4)", Supplier Part Number 1=LM5002SD/NOPBTR-ND, Voltage - Input (Max)=75V, Voltage - Input (Min)=3.1V, Voltage - Output (Max)="76V (Switch)", Base Part Number=LM5002, Category 1="Integrated Circuits (ICs)", ComponentLink1Description=http://www.ti.com/lit/ds/symlink/lm5002.pdf, ComponentLink1URL=http://www.ti.com/lit/ds/symlink/lm5002.pdf, Description 1="IC REG MULT CONFIG ISO ADJ 8WSON", Function="Step-Up, Step-Up/Step-Down", Mounting Type="Surface Mount", Number of Outputs=1, Output Configuration="Positive, Isolation Capable", Output Type=Adjustable, Packaging="Tape & Reel (TR)", Part Status=Active, Pricing 1="1000=1.9656, 2000=1.86732, 5000=1.79712 (USD)", RoHS 1="RoHS Compliant", Stock 1=3000, Supplier 1=Digi-Key, Synchronous Rectifier=No, Topology="Boost, Flyback, Forward Converter, SEPIC", Voltage - Output (Min/Fixed)=3.1V
J1: library part "2x1 connector"
J2: library part "3x1 connector"
L1: library part "FIXED IND 330UH 1.15A 580 MOHM", Inductance=330, Inductor Construction=Shielded, Manufacturer 1=BOURNS, Manufacturer Part Number 1=SRR1260-331K, Power Inductor Case="12.5mm x 12.5mm x 6", RMS Current (Irms)=1.15, Saturation Current (Isat)=1.1, Supplier Part Number 1=2458509, ComponentLink1Description=http://www.farnell.com/datasheets/2251090.pdf, ComponentLink1URL=http://www.farnell.com/datasheets/2251090.pdf, Description 1="BOURNS - SRR1260-331K - INDUCTOR, SHIELDED, 330UH, 1.1A, SMD", Pricing 1="1=0.843, 10=0.721, 25=0.661, 50=0.6, 100=0.552 (GBP)", Product Range="SRR1260 Series", Q Factor=22, RoHS 1=YES, Stock 1=143, Supplier 1=Farnell
L2 L4: "SMD EMI Suppression Ferrite Bead WE-CBF, Z = 330 Ohm", ComponentLink1Description="Manufacturer Link", ComponentLink1URL=http://www.we-online.com, ComponentLink2Description=Datasheet, ComponentLink2URL=http://www.we-online.de/katalog/media/pdf/742792037.pdf, DatasheetVersion=Dec-2005, Impedance="330 Ohm", PackageDescription="Chip Inductor, 2-Leads, Body 2.0 x 1.2 mm", PackageReference=SMD-0805, PackageVersion=2005
L3: library part #B952AS-H-330M=P3, "Shielded Wirewound Inductor 33uH 20% 1600mA 0.125Ω SMD", Case/Package=Nonstandard, Current Rating=1.6A, DC Resistance (DCR)=125mR, Inductance=33uH, Max Operating Temperature=85°C, Min Operating Temperature=-40°C, Resistor Type=Wirewound, Saturation Current=2A, Test Frequency=100kHz, Tolerance=20%, Core Material=Ferrite, Height - Seated (Max)=0.19inch, Length=0.409inch, Mount="Surface Mount", Packaging="Tape and Reel", Shielding=Shielded, Width=0.409inch
L5: library part LQH5BPN150MT0L, "15µH Shielded Wirewound Inductor 1.2A 187mOhm Max Nonstandard", Case Code (Imperial)=2020, Case Code (Metric)=5050, Current Rating=1.2A, DC Resistance (DCR)=225mR, Inductance=15uH, Inductance Tolerance=20%, Max DC Current=1.6A, Max Operating Temperature=85°C, Min Operating Temperature=-40°C, Package Quantity=500, Resistor Type=Wirewound, Self Resonant Frequency=18MHz, Test Frequency=100kHz, Case/Package=2020, Core Material=Ferrite, DC Current=1.2A, Depth=5.2mm, Height=2mm, Height - Seated (Max)=0.086inch, Length=0.197inch, Military Standard=Not, Mount="Surface Mount", Packaging="Tape and Reel", REACH SVHC="No SVHC", Saturation Current=1.6A, Shielding=Shielded, Termination=SMD/SMT, Tolerance=20%, Width=5mm
L6: library part PA2891.261HL, "260nH Shielded  Inductor 72A 0.22mOhm Nonstandard", Case/Package=SMD/SMT, Current Rating=72A, DC Resistance (DCR)=0.22mR, Inductance=260nH, Manufacturer=Pulse, Manufacturer Part Number=PA2891.261HLT, Max Operating Temperature=85°C, Min Operating Temperature=-40°C, Package Quantity=1, Resistor Type=Wirewound, Saturation Current=67A, Test Frequency=100kHz, Tolerance=10%, Category="Fixed Inductors", Core Material=Ferrite, Height - Seated (Max)=0.19inch, Length=0.539inch, Mount="Surface Mount", Packaging=Bulk, RoHS Compliant=Yes, Series=PA2891.XXXHL, Shielding=Unshielded, Width=0.51inch
Q1 Q2 Q3 Q4 Q5 Q6: "N-Channel 80V 89A (Tc) 195W (Tc) Surface Mount LFPAK56, Power-SO8", Manufacturer=Nexperia, Category=MOSFETs, ComponentLink1Description=https://assets.nexperia.com/documents/data-sheet/BUK7Y9R9-80E.pdf?src-supplier=Digi-Key, ComponentLink1URL=https://assets.nexperia.com/documents/data-sheet/BUK7Y9R9-80E.pdf?src-supplier=Digi-Key, Manufacturer Part Number=BUK7Y9R9-80EX, RoHS Compliant=No
R1 R3 R5 R6 R32: library part "CRCW0805xxxxJN Default", "RES xx OHM 1/8W 5% 0805 SMD", Category 1=Resistors
R2 R4: library part CRCW08051K00FKEA, "RES 1 KOHM 1/8W 1% 0805 SMD", Case Code - in=0805, Case Code - mm=2012, Manufacturer 1="Vishay Dale", Manufacturer 2=Vishay, Operating Temperature="-55°C ~ 155°C", Operating Temperature Range="- 55 C to + 155 C", Package / Case="0805 (2012 Metric)", Package/Case="0805 (2012 metric)", Power (Watts)="0.125W, 1/8W", Power Rating="125 mW (1/8 W)", Resistance="1 kOhms", Resistance (Ohms)=1k, Supplier Part Number 1=541-1.00KCCT-ND, Temperature Coefficient=±100ppm/°C, Tolerance=±1%, Voltage Rating="150 V", Brand="Vishay / Dale", Category 1=Resistors, Category 2="Thick Film Resistors - SMD", ComponentLink1Description=http://www.vishay.com/docs/20035/dcrcwe3.pdf, ComponentLink1URL=http://www.vishay.com/docs/20035/dcrcwe3.pdf, ComponentLink2Description=http://www.mouser.com/ds/2/427/dcrcwe3-109170.pdf, ComponentLink2URL=http://www.mouser.com/ds/2/427/dcrcwe3-109170.pdf, Composition="Thick Film", Description 1="RES SMD 1K OHM 1% 1/8W 0805", Description 2="Thick Film Resistors - SMD 1/8watt 1Kohms 1% 100ppm", Features="Automotive AEC-Q200", Height="0.020\" (0.50mm)", Length="2 mm", Manufacturer Part Number 1=CRCW08051K00FKEA, Manufacturer Part Number 2=CRCW08051K00FKEA, Minimum Order Quantity=1, Packaging="Cut Tape (CT)", Product="Thick Film Resistors SMD", Product Category="0805 Thick Film Chip Resistors", Reeling=True, RoHS 1="RoHS Compliant", RoHS 2="RoHS Compliant By Exemption", RoHS - Mouser=E, Series=CRCW, Size / Dimension="0.079\" L x 0.049\" W (2.00mm x 1.25mm)", Standard Pack Qty=5000, Supplier 1=Digi-Key, Supplier 2=Mouser, Supplier Device Package="0805 (2012 Metric)", Supplier Part Number 2=71-CRCW0805-1.0K-E3, Termination Style=SMD/SMT, Width="1.25 mm"
R7 R8: library part RR0816P-104-D, "100 kOhms ±0.5% 0.063W, 1/16W Chip Resistor 0603 (1608 Metric)  Thin Film", Case Code (Imperial)=0603, Case Code (Metric)=1608, Manufacturer=Susumu, Max Operating Temperature=125°C, Max Power Dissipation=63mW, Min Operating Temperature=-55°C, Package Quantity=1, Resistance=100kR, Resistance Tolerance=0.5%, Resistor Type="Thin Film", Temperature Coefficient=25ppm/°C, Voltage Rating=75V, Case/Package=0603, Category="Chip SMD Resistors", ComponentLink1Description=https://datasheet.ciiva.com/2487/rr-data-sheet-2487067.pdf?src-supplier=Digi-Key, ComponentLink1URL=https://datasheet.ciiva.com/2487/rr-data-sheet-2487067.pdf?src-supplier=Digi-Key, Depth=0.8mm, Height=0.4mm, Lead Free="Lead Free", Length=1.6mm, Manufacturer Part Number=RR0816P-104-D, Number of Pins=2, Number of Terminations=2, Packaging="Tape and Reel", Power Rating=63mW, REACH SVHC=Unknown, RoHS Compliant=Yes, Series=RR, Technology="THIN FILM", Termination=SMD/SMT, Tolerance=0.5%, Voltage Rating (DC)=75V, Width=0.8mm, Working Voltage=75V
R9 R10: library part RR0816Q-510-D, "51 Ohms ±0.5% 0.063W, 1/16W Chip Resistor 0603 (1608 Metric)  Thin Film", Case Code (Imperial)=0603, Case Code (Metric)=1608, Manufacturer=Susumu, Max Operating Temperature=125°C, Max Power Dissipation=63mW, Min Operating Temperature=-55°C, Package Quantity=1, Power Rating=62.5mW, Resistor Type="Thin Film", Temperature Coefficient=50ppm/°C, Tolerance=0.5%, Voltage Rating=75V, Case/Package=0603, Category="Chip SMD Resistors", ComponentLink1Description=https://datasheet.ciiva.com/2498/rr-data-sheet-2498074.pdf?src-supplier=Digi-Key, ComponentLink1URL=https://datasheet.ciiva.com/2498/rr-data-sheet-2498074.pdf?src-supplier=Digi-Key, ComponentLink2Description=https://datasheet.ciiva.com/2498/rr-data-sheet-2498317.pdf?src-supplier=Digi-Key, ComponentLink2URL=https://datasheet.ciiva.com/2498/rr-data-sheet-2498317.pdf?src-supplier=Digi-Key, Depth=0.8mm, Height=0.4mm, Lead Free="Lead Free", Length=1.6mm, Manufacturer Part Number=RR0816Q-510-D, Mount="Surface Mount", Number of Terminations=2, Packaging="Tape and Reel", Resistance=51R, RoHS Compliant=Yes, Series=RR, Size Code=0603, Technology="THIN FILM", Termination=SMD/SMT, Voltage Rating (DC)=75V, Width=0.8mm
R11: library part RR0816P-2433-D-38D, "243 kOhms ±0.5% 0.063W, 1/16W Chip Resistor 0603 (1608 Metric)  Thin Film", Case Code (Imperial)=0603, Case Code (Metric)=1608, Manufacturer=Susumu, Max Operating Temperature=125°C, Max Power Dissipation=63mW, Min Operating Temperature=-55°C, Package Quantity=1, Power Rating=62.5mW, Resistance=243kR, Resistor Type="Thin Film", Temperature Coefficient=25ppm/°C, Tolerance=0.5%, Voltage Rating=75V, Case/Package=0603, Category="Chip SMD Resistors", ComponentLink1Description=https://datasheet.ciiva.com/2498/rr-data-sheet-2498074.pdf?src-supplier=Digi-Key, ComponentLink1URL=https://datasheet.ciiva.com/2498/rr-data-sheet-2498074.pdf?src-supplier=Digi-Key, Height=0.02inch, Lead Free="Lead Free", Length=0.063inch, Manufacturer Part Number=RR0816P-2433-D-38D, Number of Terminations=2, Packaging="Tape and Reel", RoHS Compliant=Yes, Series=RR, Termination=SMD/SMT, Voltage Rating (DC)=75V, Weight=7.1E-05oz, Width=0.8mm
R12: library part RN73C1J105KBTD, "105 kOhms ±0.1% 0.063W, 1/16W Chip Resistor 0603 (1608 Metric)  Thin Film", Case Code (Imperial)=0603, Case Code (Metric)=1608, Manufacturer="TE Connectivity", Manufacturer Part Number=RN73C1J105KBTDF, Max Operating Temperature=155°C, Max Power Dissipation=63mW, Min Operating Temperature=-55°C, Number of Resistors=1, Package Quantity=1000, Resistance=105kR, Resistance Tolerance=0.1%, Resistor Type="Thin Film", Temperature Coefficient=10ppm/°C, Voltage Rating=50V, Case/Package=0603, Category="Chip SMD Resistors", ComponentLink1Description=https://www.te.com/commerce/DocumentDelivery/DDEController?Action=srchrtrv&amp;DocNm=1773270&amp;DocType=DS&amp;DocLang=English&src-supplier=Digi-Key, ComponentLink1URL=https://www.te.com/commerce/DocumentDelivery/DDEController?Action=srchrtrv&amp;DocNm=1773270&amp;DocType=DS&amp;DocLang=English&src-supplier=Digi-Key, ELV=Compliant, Height=0.45mm, Length=1.55mm, Mount="Surface Mount", Number of Terminations=2, Packaging="Tape and Reel", Power Rating=63mW, RoHS Compliant=Yes, Series="RN73, Holsworthy", Termination=Solder, Tolerance=0.1%, Voltage Rating (DC)=50V, Width=0.8mm
R13: library part RR0816P-2212-D-34C, "22.1 kOhms ±0.5% 0.063W, 1/16W Chip Resistor 0603 (1608 Metric)  Thin Film", Case Code (Imperial)=0603, Case Code (Metric)=1608, Manufacturer=Susumu, Max Operating Temperature=125°C, Max Power Dissipation=63mW, Min Operating Temperature=-55°C, Package Quantity=1, Power Rating=62.5mW, Resistance=22.1kR, Resistor Type="Thin Film", Temperature Coefficient=25ppm/°C, Tolerance=0.5%, Voltage Rating=75V, Case/Package=0603, Category="Chip SMD Resistors", ComponentLink1Description=https://datasheet.ciiva.com/2497/rr-data-sheet-2497842.pdf?src-supplier=Digi-Key, ComponentLink1URL=https://datasheet.ciiva.com/2497/rr-data-sheet-2497842.pdf?src-supplier=Digi-Key, Height=0.02inch, Height - Seated (Max)=0.02inch, Lead Free="Lead Free", Length=0.063inch, Manufacturer Part Number=RR0816P-2212-D-34C, Number of Terminations=2, Packaging="Tape and Reel", RoHS Compliant=Yes, Series=RR, Size Code=0603, Termination=SMD/SMT, Voltage Rating (DC)=75V, Width=0.032inch
R14: library part RR0816P-2102-D-32C, "21 kOhms ±0.5% 0.063W, 1/16W Chip Resistor 0603 (1608 Metric)  Thin Film", Case Code (Imperial)=0603, Case Code (Metric)=1608, Manufacturer=Susumu, Max Operating Temperature=125°C, Max Power Dissipation=63mW, Min Operating Temperature=-55°C, Package Quantity=1, Power Rating=62.5mW, Resistance=21kR, Resistor Type="Thin Film", Temperature Coefficient=25ppm/°C, Tolerance=0.5%, Voltage Rating=75V, Case/Package=0603, Category="Chip SMD Resistors", ComponentLink1Description=https://datasheet.ciiva.com/2487/rr-data-sheet-2487553.pdf?src-supplier=Digi-Key, ComponentLink1URL=https://datasheet.ciiva.com/2487/rr-data-sheet-2487553.pdf?src-supplier=Digi-Key, Height=0.02inch, Lead Free="Lead Free", Length=0.063inch, Manufacturer Part Number=RR0816P-2102-D-32C, Number of Terminations=2, Packaging="Tape and Reel", RoHS Compliant=Yes, Series=RR, Size Code=0603, Termination=SMD/SMT, Voltage Rating (DC)=75V, Width=0.8mm
R15 R16 R29 R33: library part RC0805JR-070RL, "0 Ohms Jumper 0.125W, 1/8W Chip Resistor 0805 (2012 Metric) Moisture Resistant Thick Film"
R17 R18 R24 R25 R34 R39: library part CRCW08058R20JNEA, "8.2 Ohms ±5% 0.125W, 1/8W Chip Resistor 0805 (2012 Metric) Automotive AEC-Q200 Thick Film", Case Code (Imperial)=0805, Case Code (Metric)=2012, Manufacturer="Vishay Dale", Max Operating Temperature=155°C, Max Power Dissipation=125mW, Min Operating Temperature=-55°C, Package Quantity=1, Resistance Tolerance=5%, Resistor Type="Thick Film", Temperature Coefficient=200ppm/°C, Voltage Rating=150V, Case/Package=0805, Category="Chip SMD Resistors", ComponentLink1Description=https://datasheet.ciiva.com/2512/dcrcwe3-2512297.pdf?src-supplier=Digi-Key, ComponentLink1URL=https://datasheet.ciiva.com/2512/dcrcwe3-2512297.pdf?src-supplier=Digi-Key, Construction=Rectangular, Contact Plating=Tin, Depth=1.25mm, Features="Automotive AEC-Q200", Height=0.02inch, Lead Free="Lead Free", Length=2mm, Manufacturer Part Number=CRCW08058R20JNEA, Military Standard=Not, Mount="Surface Mount", Number of Pins=2, Number of Terminations=2, Packaging="Tape and Reel", Power Rating=125mW, Radiation Hardening=No, REACH SVHC=Unknown, Resistance=8.2R, RoHS Compliant=Yes, Series=CRCW, Size Code=0805, Tolerance=5%, Voltage Rating (DC)=150V, Weight=0.000194oz, Width=1.25mm
R19 R28 R36: library part CRCW12062R00FKEA, "2 Ohms ±1% 0.25W, 1/4W Chip Resistor 1206 (3216 Metric) Automotive AEC-Q200 Thick Film", Case Code (Imperial)=1206, Case Code (Metric)=3216, Manufacturer="Vishay Dale", Max Operating Temperature=155°C, Max Power Dissipation=250mW, Min Operating Temperature=-55°C, Package Quantity=10, Resistance Tolerance=1%, Resistor Type="Thick Film", Temperature Coefficient=100ppm/°C, Voltage Rating=200V, Case/Package=1206, Category="Chip SMD Resistors", ComponentLink1Description=https://datasheet.ciiva.com/2469/dcrcwe3-2469237.pdf?src-supplier=Digi-Key, ComponentLink1URL=https://datasheet.ciiva.com/2469/dcrcwe3-2469237.pdf?src-supplier=Digi-Key, Construction=Rectangular, Contact Plating=Tin, Depth=1.6mm, Features="Automotive AEC-Q200", Height=0.024inch, Lead Free="Lead Free", Length=3.2mm, Manufacturer Part Number=CRCW12062R00FKEA, Military Standard=Not, Number of Pins=2, Number of Terminations=2, Packaging="Tape and Reel", Power Rating=250mW, Radiation Hardening=No, REACH SVHC=Unknown, Resistance=2R, RoHS Compliant=Yes, Series=CRCW, Termination=SMD/SMT, Tolerance=1%, Voltage Rating (DC)=200V, Weight=0.000353oz, Width=1.6mm
R20 R21 R26 R27 R35 R40: library part RR0816P-103-D, "10 kOhms ±0.5% 0.063W, 1/16W Chip Resistor 0603 (1608 Metric)  Thin Film", Case Code (Imperial)=0603, Case Code (Metric)=1608, Manufacturer=Susumu, Max Operating Temperature=125°C, Max Power Dissipation=63mW, Min Operating Temperature=-55°C, Package Quantity=1, Resistance=10kR, Resistance Tolerance=0.5%, Resistor Type="Thin Film", Temperature Coefficient=25ppm/°C, Voltage Rating=75V, Case/Package=0603, Category="Chip SMD Resistors", Depth=0.8mm, Height=0.4mm, Lead Free="Lead Free", Length=1.6mm, Manufacturer Part Number=RR0816P-103-D, Number of Pins=2, Number of Terminations=2, Packaging="Tape and Reel", Power Rating=63mW, REACH SVHC=Unknown, RoHS Compliant=Yes, Series=RR, Size Code=0603, Technology="THIN FILM", Termination=SMD/SMT, Tolerance=0.5%, Voltage Rating (DC)=75V, Weight=7.1E-05oz, Width=0.8mm
R22 R23 R30 R31 R37 R38: library part RR0816P-102-D, "1 kOhms ±0.5% 0.063W, 1/16W Chip Resistor 0603 (1608 Metric)  Thin Film", Case Code (Imperial)=0603, Case Code (Metric)=1608, Manufacturer=Susumu, Max Operating Temperature=125°C, Max Power Dissipation=63mW, Min Operating Temperature=-55°C, Package Quantity=1, Resistance=1kR, Resistance Tolerance=0.5%, Resistor Type="Thin Film", Temperature Coefficient=25ppm/°C, Voltage Rating=75V, Case/Package=0603, Category="Chip SMD Resistors", ComponentLink1Description=https://datasheet.ciiva.com/2487/rr-data-sheet-2487025.pdf?src-supplier=Digi-Key, ComponentLink1URL=https://datasheet.ciiva.com/2487/rr-data-sheet-2487025.pdf?src-supplier=Digi-Key, Depth=0.8mm, Height=0.4mm, Lead Free="Lead Free", Length=1.6mm, Manufacturer Part Number=RR0816P-102-D, Number of Pins=2, Number of Terminations=2, Packaging="Tape and Reel", Power Rating=63mW, REACH SVHC=Unknown, RoHS Compliant=Yes, Series=RR, Size Code=0603, Technology="THIN FILM", Termination=SMD/SMT, Tolerance=0.5%, Voltage Rating (DC)=75V, Width=0.031inch
U1 U2: "Buck Switching Regulator IC Positive Adjustable 1V 1 Output 1A SOT-23-6", Manufacturer="Texas Instruments", Manufacturer Part Number=LMR50410XFDBVR
U3: "IC REG LINEAR 6V 1A D2PAK", Case/Package=D2PAK, Dropout Voltage=2V, Manufacturer="ON Semiconductor", Max Input Voltage=35V, Max Operating Temperature=125°C, Max Output Current=1A, Min Operating Temperature=-40°C, Min Output Voltage=6V, Output Voltage Accuracy=4%, Package Quantity=50, Quiescent Current=8mA, Accuracy=4%, Category="Voltage Regulators - Linear", ComponentLink1Description=https://datasheet.ciiva.com/6581/mc7800-d-6581174.pdf?src-supplier=Digi-Key, ComponentLink1URL=https://datasheet.ciiva.com/6581/mc7800-d-6581174.pdf?src-supplier=Digi-Key, Contact Plating=Tin,Matte, Halogen Free="Halogen Free", Height=4.572mm, Lead Free="Lead Free", Length=10.24mm, Manufacturer Part Number=MC7806BD2TG, Min Input Voltage=35V, Mount="Surface Mount", Number of Outputs=1, Number of Pins=3, Number of Regulators=1, Output Current=1A, Output Type=Fixed, Output Voltage=6V, Packaging=Rail/Tube, Polarity=Positive, Radiation Hardening=No, RoHS Compliant=Yes, Series=-, Width=9.347mm
U4 U5 U6: "Half-Bridge Gate Driver IC Non-Inverting 8-SOIC", Case/Package=SOIC, Manufacturer="Texas Instruments", Max Operating Temperature=140°C, Max Output Current=4A, Max Supply Current=4.3mA, Max Supply Voltage=17V, Min Operating Temperature=-40°C, Min Supply Voltage=8V, Operating Supply Voltage=12V, Package Quantity=75, Category="Gate Drivers", ComponentLink1Description=https://datasheet.ciiva.com/1951/ucc27210-1951181.pdf?src-supplier=Digi-Key, ComponentLink1URL=https://datasheet.ciiva.com/1951/ucc27210-1951181.pdf?src-supplier=Digi-Key, Fall Time=400ns, Height=1.5mm, Lead Free="Lead Free", Length=5mm, Manufacturer Part Number=UCC27211D, Mount="Surface Mount", Nominal Supply Current=4A, Number of Channels=2, Number of Drivers=2, Number of Outputs=2, Number of Pins=8, Output Current=4A, Packaging=Rail/Tube, Propagation Delay=40ns, Radiation Hardening=No, REACH SVHC="No SVHC", Rise Time=600ns, RoHS Compliant=Yes, Series=-, Supply Current=4A, Turn-On Delay Time=40ns, Width=4mm

## Nets (pads, with @x,y where several pads share a name; then routed paths per layer and width w, separated by ;. In a path a pad name is that pad's centre, name@x,y a point inside that pad or via, vN(x,y) a via of type N, cw(c..) or ccw(c..) an arc to the next point about the centre after c; other vN are vias at no path point)
+6VDC: C20.2 D4.1 L5.2 R10.2 R16.2
+12VDC: C17.2 C18.1 C23.2 C27.2 C33.2 D3.1 D5.2 D11.2 D17.2 L3.2 L4.1 R9.2 R15.1 U4.1 U5.1 U6.1
+24V: F1.1 J1.1
GND: C1.2 C3.2 C4.2 C5.2 C6.2 C7.2 C8.2 C9.2 C10.1 C11.2 C14.1 C16.1 C17.1 C18.2 C20.1 C21.1 C22.1 C23.1 C25.1 C26.1 C27.1 C29.1 C30.1 C31.1 C32.1 C33.1 C35.1 C36.1 C37.2 D9.2 D10.2 D20.2 F1.2 IC1.4 J1.2 Q3.1 Q3.2 Q3.3 Q4.1 Q4.2 Q4.3 Q6.1 Q6.2 Q6.3 R4.1 R5.1 R6.1 R13.1 R14.1 R26.1 R27.1 R32.1 R40.1 U1.2 U2.2 U3.4 U4.7 U5.7 U6.7
GND_chasis2: C31.2 C32.2
HI_1: R33.1
HO_1: R17.1 U4.3
HO_2: R18.2 U5.3
HS_1: C24.2 D8.2 J3.1 Q1.1 Q1.2 Q1.3 Q4.5 R20.1 U4.4 | length 7.1
  Top Layer w10: 6755,3629.57 6760,3634.57
HS_2: C28.2 D7.2 J5.1 Q2.1 Q2.2 Q2.3 Q3.5 R21.1 U5.4
LI_1: R29.2
LO_1: R24.1 U4.8
LO_2: R25.2 U5.8
MOD_HO: R34.1 U6.3
MOD_HS: C34.2 D19.2 L6.1 Q5.1 Q5.2 Q5.3 Q6.5 R35.1 U6.4
MOD_LO: R39.1 U6.8
NetC2_1: C2.1 IC1.7
NetC2_2: C2.2 R3.1
NetC10_2: C10.2 IC1.8 R2.1 R4.2
NetC11_1: C11.1 IC1.3
NetC12_1: C12.1 L3.1 U1.6
NetC12_2: C12.2 U1.1
NetC13_1: C13.1 L5.1 U2.6
NetC13_2: C13.2 U2.1
NetC14_2: C14.2 D2.1 L2.2 R7.1 U1.5
NetC15_1: C15.1 R11.1 R13.2 U1.3
NetC15_2: C15.2 R9.1 R11.2
NetC16_2: C16.2 L4.2 R8.1 U2.5
NetC19_1: C19.1 R12.1 R14.2 U2.3
NetC19_2: C19.2 R10.1 R12.2
NetC21_2: C21.2 R16.1 U3.3
NetC22_2: C22.2 R15.2 U3.1
NetC24_1: C24.1 D6.2 R19.2
NetC25_2: C25.2 R23.2 TP6.1 U4.6
NetC26_2: C26.2 R22.2 TP5.1 U4.5
NetC28_1: C28.1 D12.2 R28.2
NetC29_2: C29.2 R31.2 TP11.1 U5.6
NetC30_2: C30.2 R30.2 TP10.1 U5.5
NetC34_1: C34.1 D18.2 R36.2
NetC35_2: C35.2 R38.2 TP15.1 U6.6
NetC36_2: C36.2 R37.2 TP14.1 U6.5
NetD1_1: D1.1 IC1.1 L1.2
NetD5_1: D5.1 D6.1 R19.1 TP2.1 U4.2
NetD7_1: D7.1 Q2.4 R18.1 R21.2 TP4.1
NetD8_1: D8.1 Q1.4 R17.2 R20.2 TP3.1
NetD9_1: D9.1 Q3.4 R25.1 R26.2 TP7.1